# Altium PCB Drone.PcbDoc
Units mil, origin at the board's own origin, x right, y up, seen from the top; angles counter-clockwise.
Board outline 4458.99 x 5225 mil, 2 copper layers (Top Layer, Bottom Layer); 14 components, 21 nets, 154 pads, 2 vias.
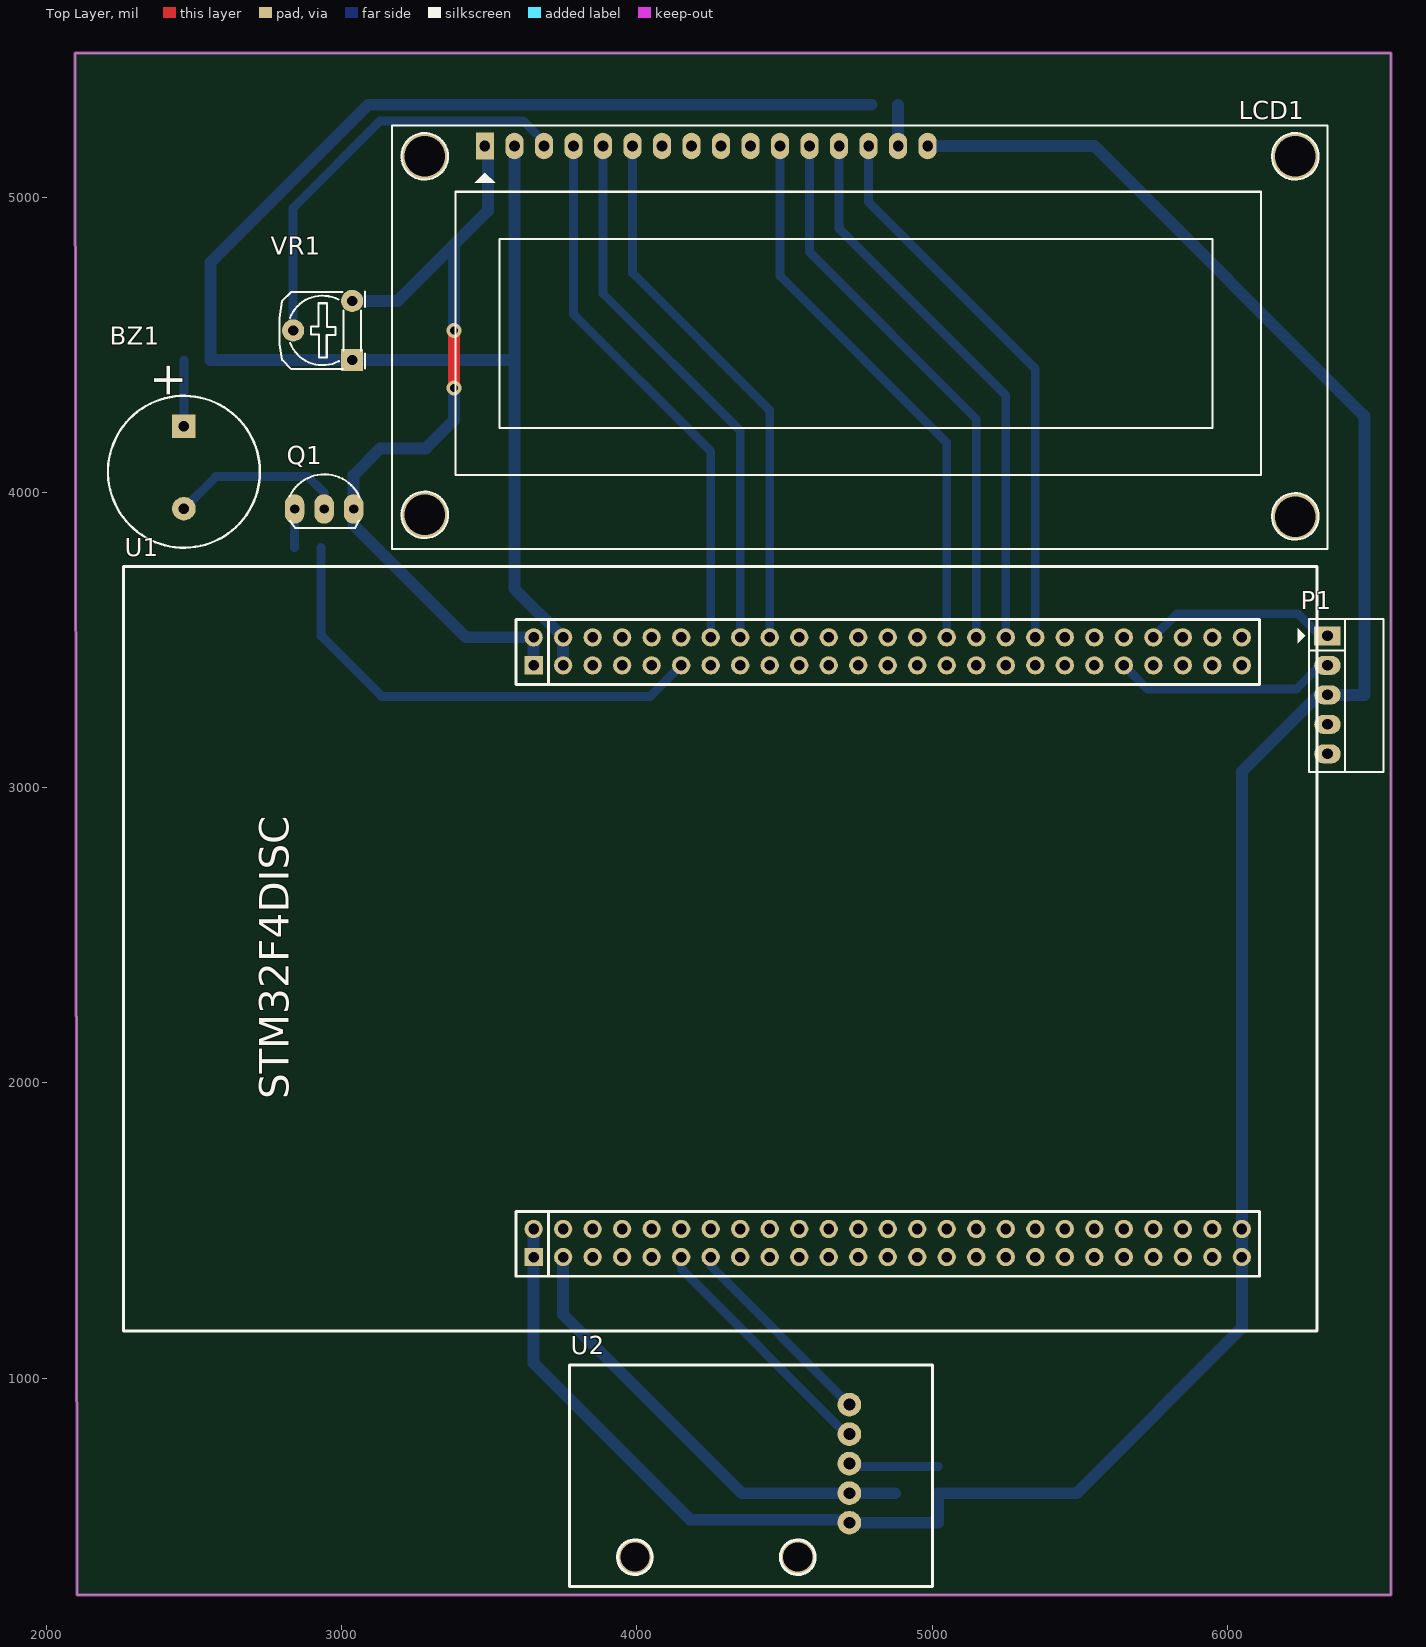
[diagram p0: Top Layer view]
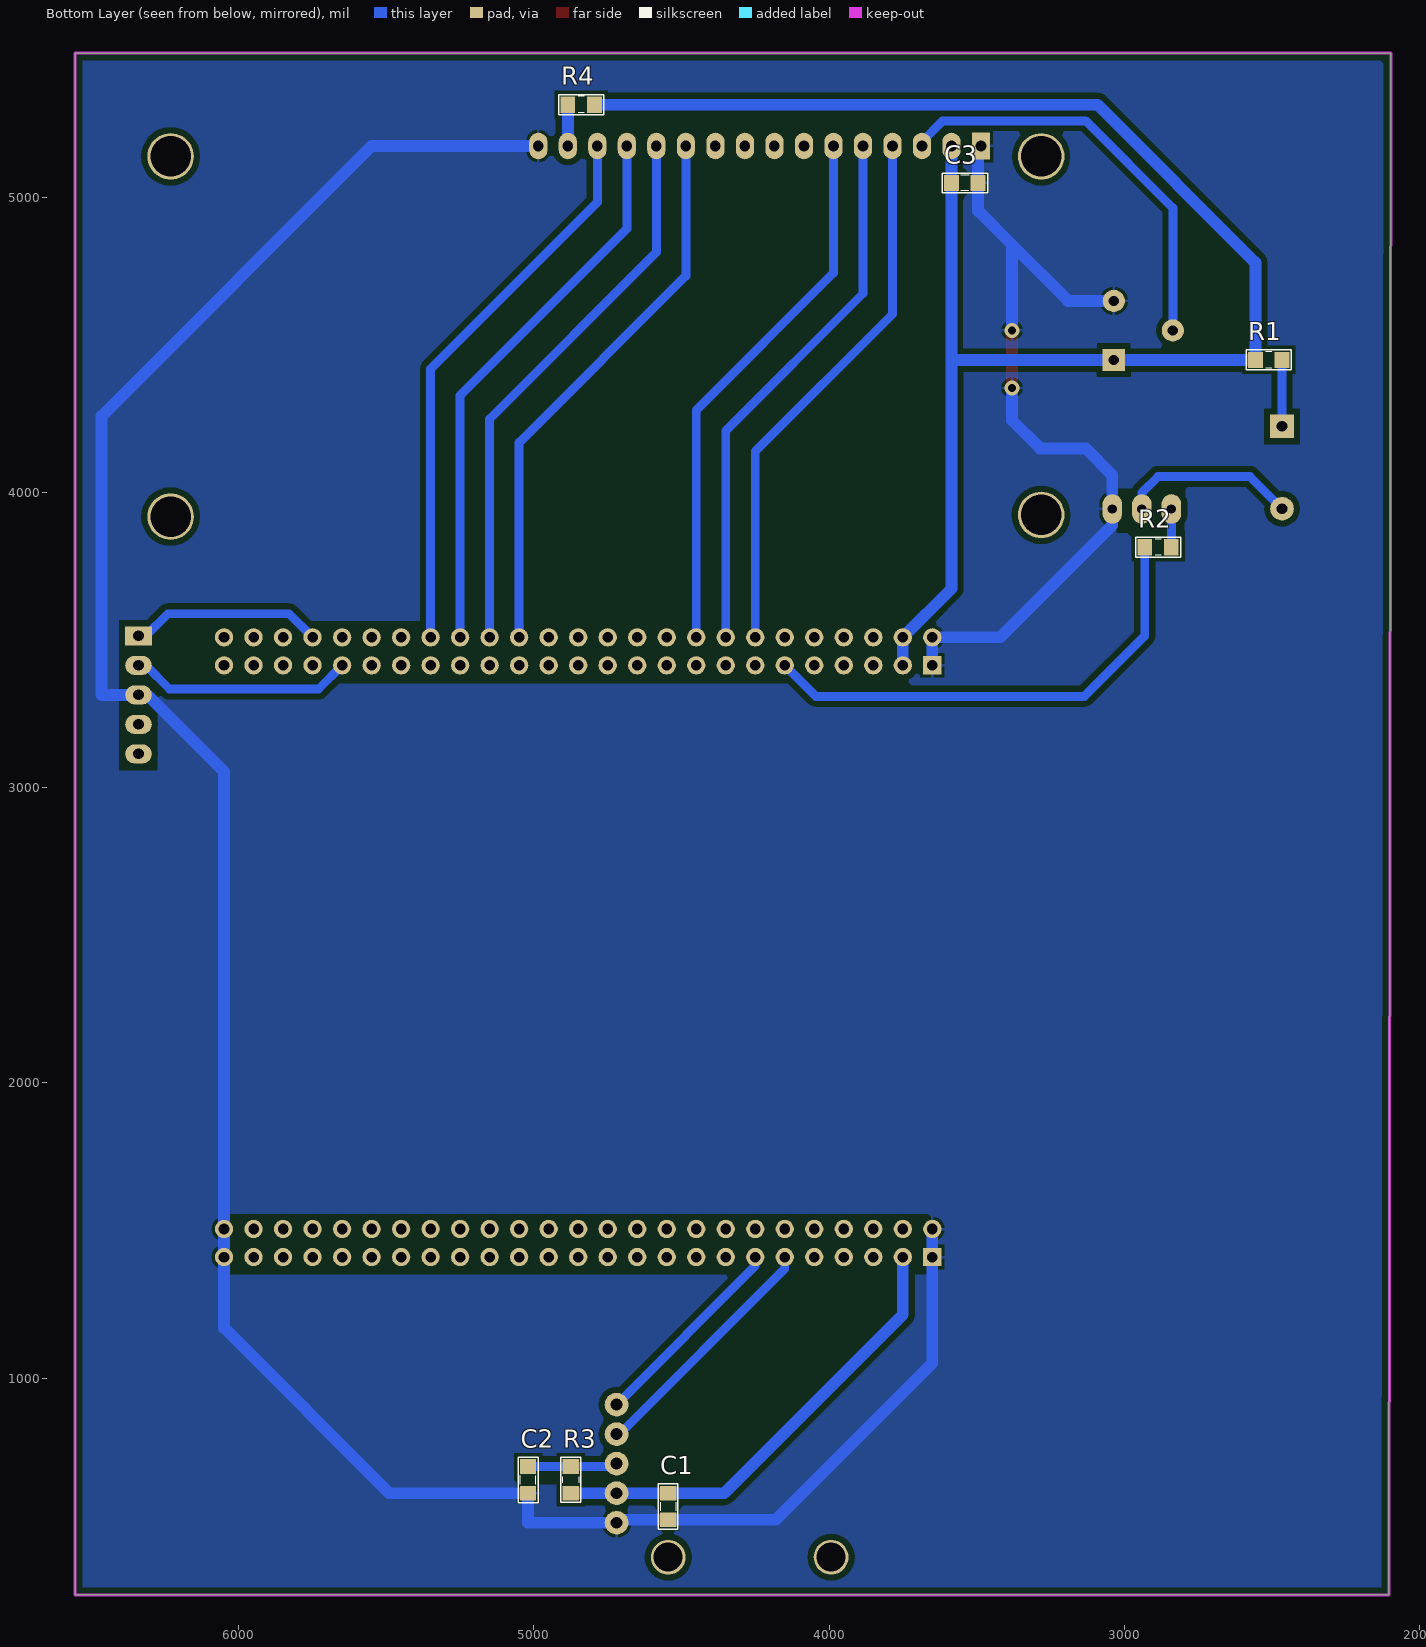
[diagram p1: Bottom Layer view, seen from below]
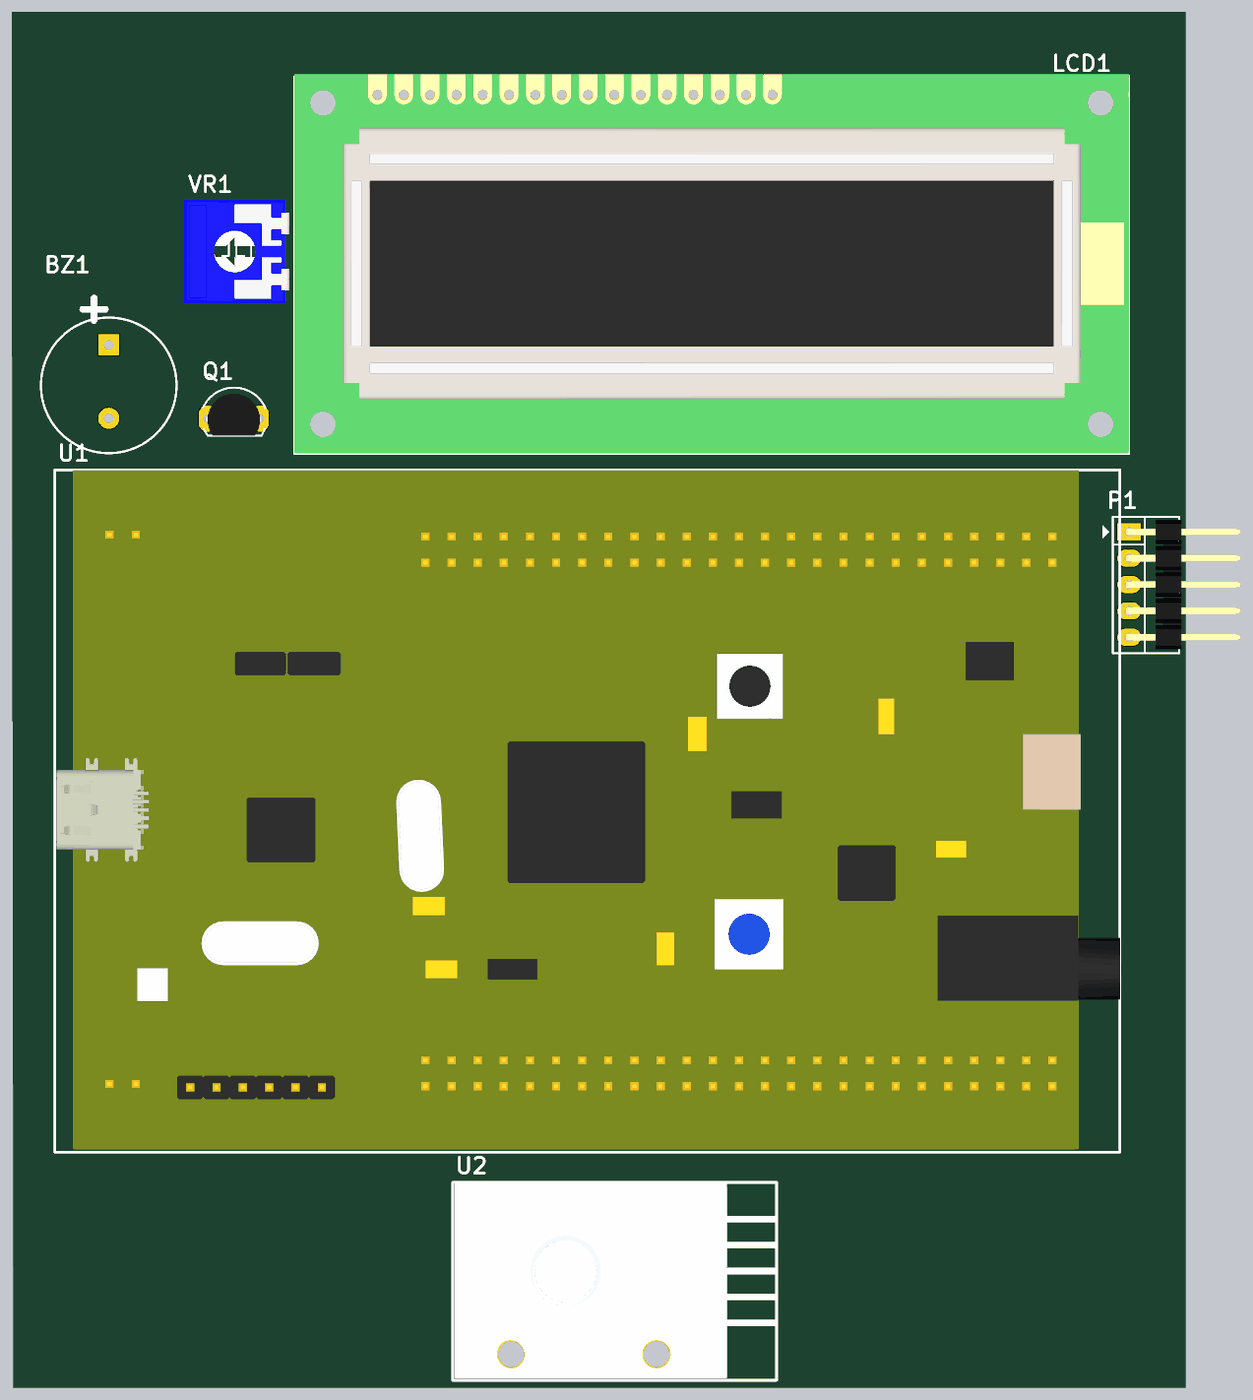
[diagram p2: 3D render of the assembled board from above, using the file's embedded part models]
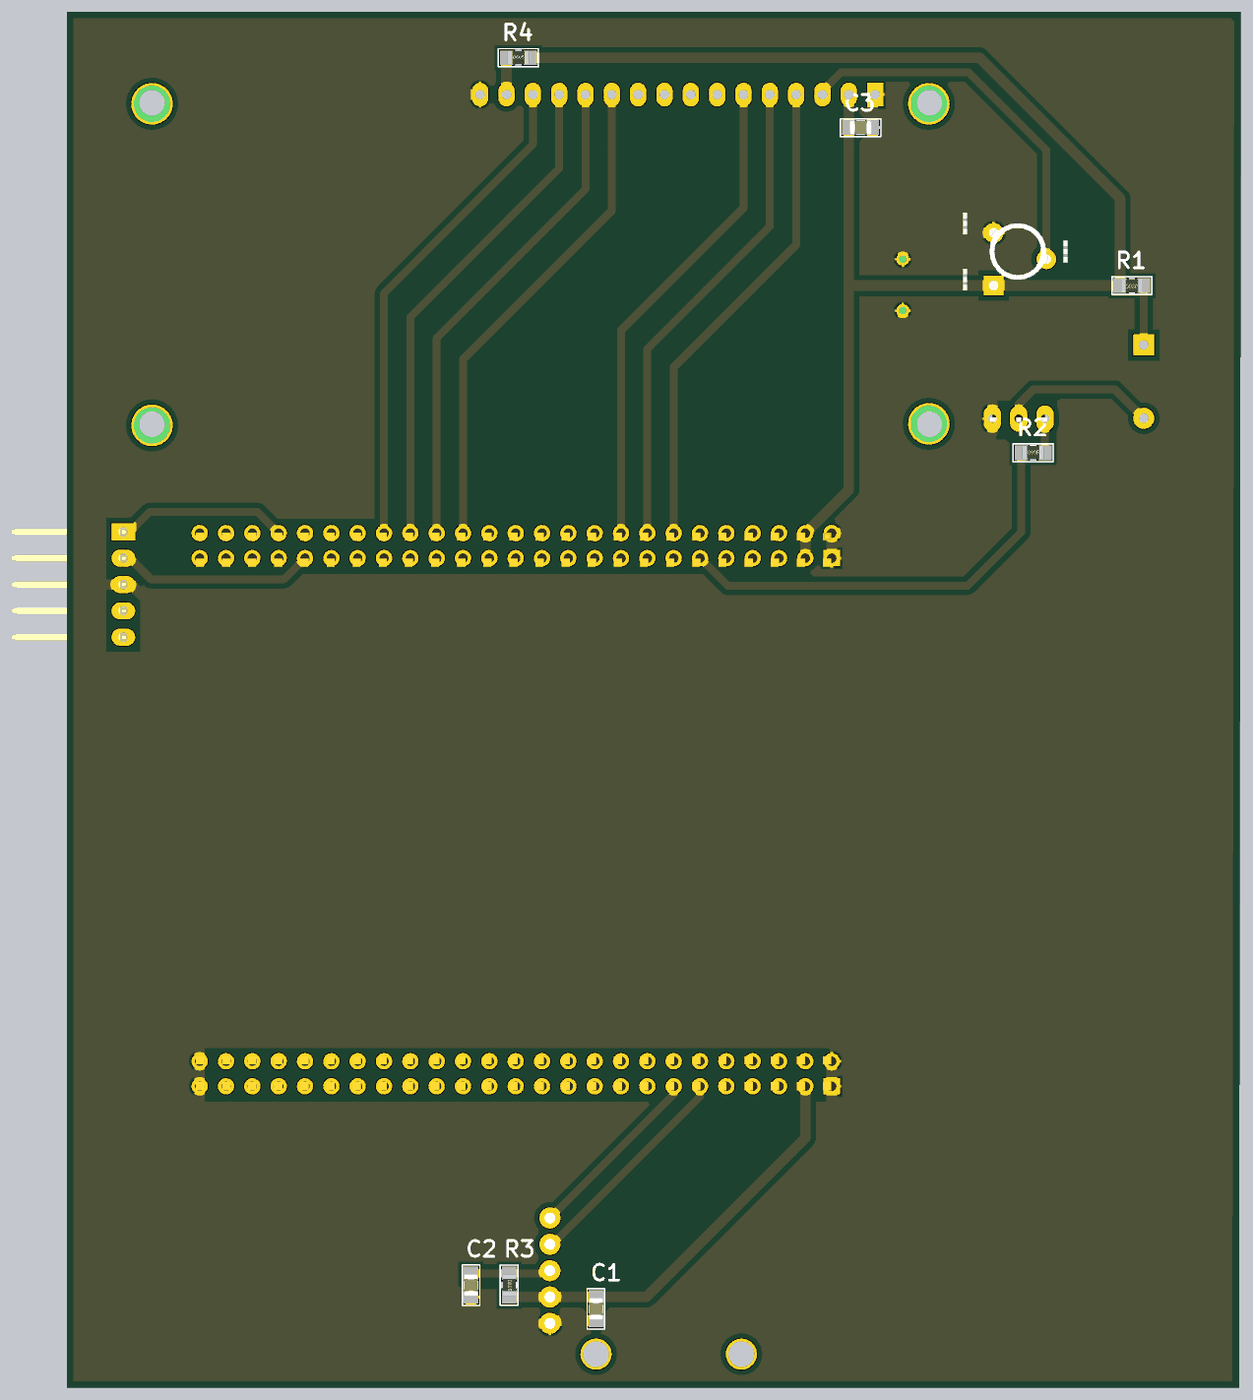
[diagram p3: 3D render of the assembled board from below, using the file's embedded part models]

## Layer stack, top to bottom
Top Solder: solder mask 0.4, Solder Resist, Dk 3.5
Top Layer: signal copper 1.4
Dielectric 1: dielectric 12.6, FR-4, Dk 4.8
Bottom Layer: signal copper 1.4
Bottom Solder: solder mask 0.4, Solder Resist, Dk 3.5

## Board outline
2103.08,265 2096.01,5490 6555,5490 6555,265

## Design rules (kind name [scope] priority, off if disabled: settings)
Clearance [All] p1: gap=20 ignorepadtopadclearanceinfootprint=FALSE
Height [All] p1: minheight=0 maxheight=5000 prefheight=500
PolygonConnect [All] p1: connectstyle=Relief reliefconductorwidth=10 reliefentries=4 polygonreliefangle="90 Angle" airgapwidth=10
RoutingVias [All] p1: holewidth=28 width=50 viastyle="Through Hole" minholewidth=28 minwidth=50 maxholewidth=28 maxwidth=50
SolderMaskExpansion [All] p1: expansion=4
Width [All] p1: maxlimit=50 minlimit=20 preferedwidth=40 minimp=50.000000 maximp=50.000000 favimp=50.000000
29 further rules are at their usual default settings.

## Components (designator, comment, footprint, x,y, rotation, side; value= is the part's Value field where it differs from the comment)
BZ1 "Buzzer" BUZZER 2465,4226.03 r270 top
C1 "Cap-10uF-50V-0805" CAP-SM-0805 4545,610 r270 bottom value=10uF/50V
C2 "Cap-100nF-50V-0805" CAP-SM-0805 5020,610 r90 bottom value=100nF/50V
C3 "Cap-10uF-50V-0805" CAP-SM-0805 3585,5050 r180 bottom value=10uF/50V
LCD1 "CD1602 Xanh Dương" LCD16X2 3485,5175 r0 top
P1 "Header 5H" JP5H 6340,3515 r270 top
Q1 "C1815" QTO-92 2940,3945 r0 top
R1 "Res-1K-0805" RES-SM-0805 2465,4450 r0 bottom value=1K
R2 "Res-10k-0805" RES-SM-0805 2930,3815 r180 bottom value=10K
R3 "Res-1K-0805" RES-SM-0805 4875,700 r270 bottom value=1K
R4 "Res-1K-0805" RES-SM-0805 4885,5315 r180 bottom value=1K
U1 "STM32F4 DISC" "STM32F4 DISC" 3650,1410 r90 top
U2 "Rotary Encoder" "Rotary Encoder" 4720,910 r270 top
VR1 "10K" "Varistor 1" 3035,4450 r90 top value="VR 10K"

## Footprints (in the part's own frame and the unit in brackets; to place one, negate y for a bottom-side part, rotate by r counter-clockwise, add the part's x,y. Pads: shape width x height; smd on the part's side, far side on the other; paste and mask are expansions set on the pad)
BUZZER [mil] "Buzzer"
  rect 80x80 hole 36: 1(1.27,0)
  round 80 hole 36: 2(280,0)
  silkscreen extent -102,-257 412,257
CAP-SM-0805 [mil]
  rect 50x55 smd: 1(0,0) 2(90,0)
  silkscreen extent -32,-34 122,33, body extent 4,-27 86,27, height 30
JP5H [mil]
  rect 65x90 hole 36: 1(0,0)
  oval 65x90 hole 36: 2(100,0) 3(200,0) 4(300,0) 5(400,0)
  silkscreen extent -57,-101 461,190, body extent -46,-15 446,424, height 99
LCD16X2 [mil] "LCD dipslay 16x2, 16 pin"
  rect 62x90 hole 36: 1(0,0)
  oval 62x90 hole 36: 2(100,0) 3(200,0) 4(300,0) 5(400,0) 6(500,0) 7(600,0) 8(700,0) 9(800,0) 10(900,0) 11(1000,0) 12(1100,0) 13(1200,0) 14(1300,0) 15(1400,0) 16(1500,0)
  round 157.48 hole 137.8: 100(2746,-35) 101(2746,-1256) 102(-204,-1250) 103(-204,-35)
  silkscreen extent -315,-1365 2855,70, body extent -315,-1360 2855,77, height 914
QTO-92 [mil] "TO-92"
  oval 66x100 hole 32: 1(-100,0) 2(0,0) 3(100,0)
  silkscreen extent -117,-65 120,118, body extent -109,-66 109,95, height 245
RES-SM-0805 [mil]
  rect 50x55 smd: 1(0,0) 2(90,0)
  silkscreen extent -31,-34 121,34, body extent -5,-24 95,25, height 20
"Rotary Encoder" [mil]
  round 80 hole 40: 1(0,0) 2(100,0) 3(200,0) 4(300,0) 5(400,0)
  round 118.11 hole 98.43: 104(517,-175) 105(517,-727)
  silkscreen extent -135,-949 616,281, body extent -131,-943 609,279, height 1138
"STM32F4 DISC" [mil]
  rect 62x62 hole 36: 1(0,0) 51(2005,0)
  round 62 hole 36: 2(95,0) 3(0,-100) 4(95,-100) 5(0,-200) 6(95,-200) 7(0,-300) 8(95,-300) 9(0,-400) 10(95,-400) 11(0,-500) 12(95,-500) 13(0,-600) 14(95,-600) 15(0,-700) 16(95,-700) 17(0,-800) 18(95,-800) 19(0,-900) 20(95,-900) 21(0,-1000) 22(95,-1000) 23(0,-1100) 24(95,-1100) 25(0,-1200) 26(95,-1200) 27(0,-1300) 28(95,-1300) 29(0,-1400) 30(95,-1400) 31(0,-1500) 32(95,-1500) 33(0,-1600) 34(95,-1600) 35(0,-1700) 36(95,-1700) 37(0,-1800) 38(95,-1800) 39(0,-1900) 40(95,-1900) 41(0,-2000) 42(95,-2000) 43(0,-2100) 44(95,-2100) 45(0,-2200) 46(95,-2200) 47(0,-2300) 48(95,-2300) 49(0,-2400) 50(95,-2400) 52(2100,0) 53(2005,-100) 54(2100,-100) 55(2005,-200) 56(2100,-200) 57(2005,-300) 58(2100,-300) 59(2005,-400) 60(2100,-400) 61(2005,-500) 62(2100,-500) 63(2005,-600) 64(2100,-600) 65(2005,-700) 66(2100,-700) 67(2005,-800) 68(2100,-800) 69(2005,-900) 70(2100,-900) 71(2005,-1000) 72(2100,-1000) 73(2005,-1100) 74(2100,-1100) 75(2005,-1200) 76(2100,-1200) 77(2005,-1300) 78(2100,-1300) 79(2005,-1400) 80(2100,-1400) 81(2005,-1500) 82(2100,-1500) 83(2005,-1600) 84(2100,-1600) 85(2005,-1700) 86(2100,-1700) 87(2005,-1800) 88(2100,-1800) 89(2005,-1900) 90(2100,-1900) 91(2005,-2000) 92(2100,-2000) 93(2005,-2100) 94(2100,-2100) 95(2005,-2200) 96(2100,-2200) 97(2005,-2300) 98(2100,-2300) 99(2005,-2400) 100(2100,-2400)
  silkscreen extent -250,-2655 2340,1390, body extent -240,-2655 2339,1383, height 731
"Varistor 1" [mil] "Resistor Variable"
  rect 75x75 hole 35: 1(0,0)
  round 75 hole 35: 2(100,200) 3(200,0)
  silkscreen extent -31,-44 231,246, body extent -68,-117 326,285, height 165

## Part data
C1 C3: "CAP CER 10UF 50V X5R 0805", Manufacturer=Yageo, Manufacturer Part Number=CC0805KKX5R9BB106, Supplier 1 Part Number=311-3499-2-ND, Local Supplier=thegioiic, Local Supplier Link=https://thegioiic.com/products/tu-10uf-50v-0805, Supplier 1=Digikey, Supplier 1 Link=https://www.digikey.com/product-detail/en/yageo/CC0805KKX5R9BB106/311-3499-2-ND/7164383
C2: "CAP CER 0.1UF 50V Y5V 0805", Manufacturer="Samsung Electro-Mechanics", Manufacturer Part Number=CL21F104ZBCNNNC, Supplier 1 Part Number=1276-1007-1-ND, Local Supplier=thegioiic, Local Supplier Link=https://thegioiic.com/products/tu-100nf-0-1uf-50v-0805, Supplier 1=Digikey, Supplier 1 Link=https://www.digikey.com/product-detail/en/samsung-electro-mechanics/CL21F104ZBCNNNC/1276-1007-1-ND/3889093
LCD1: library part LCD16x2A, "C?m", Chung_Loai=C?m, Don_Vi=Con, Ma_Hang=MH002827, Ten_Linh_Kien="CD1602 Xanh Duong ( Ði?n Áp 3.3V)"
P1: "Header, 5-Pin, Right Angle", LatestRevisionDate=17-Jul-2002, LatestRevisionNote="Re-released for DXP Platform.", Publisher="Altium Limited"
Q1: "Dán", Chung_Loai=Dán, Don_Vi=Con, Ma_Hang=MH000946, Ten_Linh_Kien="C1815 SOT23 TRANS NPN 0.15A 50V (SMD-HF)"
R1 R3 R4: "RES 1K OHM 1% 1/4W 0805", Manufacturer="Stackpole Electronics Inc", Manufacturer Part Number=RNCP0805FTD1K00, Supplier 1 Part Number=RNCP0805FTD1K00CT-ND, Local Supplier=thegioiic, Local Supplier Link=https://thegioiic.com/products/dien-tro-1k-ohm-0805-5, Supplier 1=Digikey, Supplier 1 Link=https://www.digikey.com/product-detail/en/stackpole-electronics-inc/RNCP0805FTD1K00/RNCP0805FTD1K00CT-ND/2240568
R2: "RES 10K OHM 1% 1/4W 0805", Manufacturer="Stackpole Electronics Inc", Manufacturer Part Number=RNCP0805FTD10K0, Supplier 1 Part Number=RNCP0805FTD10K0CT-ND, Local Supplier=thegioiic, Local Supplier Link=https://thegioiic.com/products/dien-tro-10k-ohm-0805-5, Supplier 1=Digikey, Supplier 1 Link=https://www.digikey.com/product-detail/en/stackpole-electronics-inc/RNCP0805FTD10K0/RNCP0805FTD10K0CT-ND/2240601
U1: "STM32F4 Discovery board. Chip on Board is Stm32f411VET6. Speed is 150MHz"
VR1: library part "Var Resistor", "Var Resistor"

## Via types
v1: diameter 50, hole 28, Top Layer to Bottom Layer, 2 vias

## Nets (pads, with @x,y where several pads share a name; then routed paths per layer and width w, separated by ;. In a path a pad name is that pad's centre, name@x,y a point inside that pad or via, vN(x,y) a via of type N, cw(c..) or ccw(c..) an arc to the next point about the centre after c; other vN are vias at no path point)
3V: C1.1 R3.2 U1.3 U2.4 | length 1570.6
  Bottom Layer w40: U1.3 3750,1215 4355,610 C1.1 U2.4 R3.2
5V_MCU: C3.1 LCD1.2 R1.2 R4.2 U1.53 U1.54 VR1.1 | length 5652
  Bottom Layer w40: LCD1.2 C3.1 3585,4455 ; U1.53 U1.54 3750,3510.41 3585,3675.41 3585,4455 ; R4.2 3090,5315 2555,4780 R1.2 VR1.1 3580,4450 3585,4455
Buzzer: R2.1 U1.61 | length 1648.4
  Bottom Layer w30: R2.1 2930,3515 3135,3310 4045,3310 U1.61
CLK: U1.13 U2.1 | length 694.7
  Bottom Layer w30: U1.13 4250,1380 U2.1
D4: LCD1.11 U1.80 | length 1899
  Bottom Layer w30: LCD1.11 4485,4735 5050,4170 U1.80
D5: LCD1.12 U1.82 | length 1899
  Bottom Layer w30: LCD1.12 4585,4815 5150,4250 U1.82
D6: LCD1.13 U1.84 | length 1899
  Bottom Layer w30: LCD1.13 4685,4895 5250,4330 U1.84
D7: LCD1.14 U1.86 | length 1899
  Bottom Layer w30: LCD1.14 4785,4985 5350,4420 U1.86
DT: U1.11 U2.2 | length 842
  Bottom Layer w30: U1.11 4150,1370 4710,810 U2.2
E: LCD1.6 U1.68 | length 1857.6
  Bottom Layer w30: LCD1.6 3985,4745 4450,4280 U1.68
GND: C1.2 C2.1 C3.2 LCD1.1 LCD1.16 P1.3 Q1.3 U1.1 U1.2 U1.49 U1.50 U1.51 U1.52 U2.5 VR1.3 | length 11476.6
  Top Layer w40: v1(3380,4355) v1(3380,4550)
  Bottom Layer w40: VR1.3 3190,4650 3380,4840 ; v1(3380,4355) 3380,4245 3285,4150 3130,4150 3040,4060 Q1.3 3040,3890.41 3420.41,3510 U1.52 U1.51 ; v1(3380,4550) 3380,4840 ; LCD1.1 3495,5165 C3.2 3495,4955 3380,4840 ; U1.2 U1.1 3650,1050 4180,520 C1.2 4710,520 U2.5 5020,510 C2.1 5490,610 6050,1170 U1.49 U1.50 6050,3055 6310,3315 P1.3 6464.97,3315 ; LCD1.16 5550,5175 6465,4260 6465,3315.03
NetBZ1_1: BZ1.1 R1.1 | length 225.2
  Bottom Layer w30: BZ1.1 R1.1
NetBZ1_2: BZ1.2 Q1.2 | length 597.9
  Bottom Layer w30: BZ1.2 2573.97,4055 2885,4055 2940,4000 Q1.2
NetLCD1_3: LCD1.3 VR1.2 | length 1431.2
  Bottom Layer w30: VR1.2 2835,4965 3130,5260 3615,5260 3685,5190 LCD1.3
NetLCD1_15: LCD1.15 R4.1 | length 140
  Bottom Layer w40: LCD1.15 R4.1
NetQ1_1: Q1.1 R2.2 | length 130
  Bottom Layer w30: R2.2 Q1.1
R/W\: LCD1.5 U1.66 | length 1857.6
  Bottom Layer w30: LCD1.5 3885,4675 4350,4210 U1.66
RS: LCD1.4 U1.64 | length 1857.6
  Bottom Layer w30: LCD1.4 3785,4605 4250,4140 U1.64
SW: C2.2 R3.1 U2.3 | length 304.1
  Bottom Layer w30: U2.3 4730,700 R3.1 C2.2
UART_RXD: P1.2 U1.91 | length 756.3
  Bottom Layer w30: U1.91 5730,3335 6235,3335 6315,3415 P1.2
UART_TXD: P1.1 U1.94 | length 654.2
  Bottom Layer w30: U1.94 5830,3590 6240,3590 6315,3515 P1.1
pads on no net: LCD1.7 LCD1.8 LCD1.9 LCD1.10 LCD1.100 LCD1.101 LCD1.102 LCD1.103 P1.4 P1.5 U1.4 U1.5 U1.6 U1.7 U1.8 U1.9 U1.10 U1.12 U1.14 U1.15 U1.16 U1.17 U1.18 U1.19 U1.20 U1.21 U1.22 U1.23 U1.24 U1.25 U1.26 U1.27 U1.28 U1.29 U1.30 U1.31 U1.32 U1.33 U1.34 U1.35 U1.36 U1.37 U1.38 U1.39 U1.40 U1.41 U1.42 U1.43 U1.44 U1.45 U1.46 U1.47 U1.48 U1.55 U1.56 U1.57 U1.58 U1.59 U1.60 U1.62 U1.63 U1.65 U1.67 U1.69 U1.70 U1.71 U1.72 U1.73 U1.74 U1.75 U1.76 U1.77 U1.78 U1.79 U1.81 U1.83 U1.85 U1.87 U1.88 U1.89 U1.90 U1.92 U1.93 U1.95 U1.96 U1.97 U1.98 U1.99 U1.100 U2.104 U2.105

## Polygon pours and split planes (outlines as drawn)
GND on Bottom Layer "GND_L02_P-001" (solid, remove dead copper, pour order 6): 6555,5490 6555,265 2103.08,265 2103.08,5373.08 2103.08,5490
GND on Bottom Layer "GND_L02_P-001" (solid, remove dead copper, pour order 0): 2096.16,5380

## Keep-outs
Keep-Out Layer:
  the board outline again, w10

## Other copper
Bottom Layer:
  pour cut-out: 4920,640 4990,640 4990,665 4920,665
  pour cut-out: 6405,3567.5 6405,3060 6276.35,3060 6276.29,3060.07 6276.29,3570
  pour cut-out: 6368.65,3101.29
  pour cut-out: 3025,3865 3025,4013.56 2792.94,4013.56 2796.37,3865
  pour cut-out: 5824.21,3570 5819.21,3565 3735,3565 3735,3355.29 5824.67,3355
  pour cut-out: 6050,1554.69 3665,1554.69 3665,1351.89 6050,1351.89

## Text inside footprints (layer, text, board x,y; h text height)
BZ1: Top Overlay "+" at 2365,4446.03 h112.5 r270
U1: Top Overlay "STM32F4DISC" at 2820,1945 h100 r90